# Altium PCB Light source driver circuit board.PcbDoc
Units mil, origin at the board's own origin, x right, y up, seen from the top; angles counter-clockwise.
Board outline 3775.03 x 1890.03 mil, 2 copper layers (Top Layer, Bottom Layer); 21 components, 13 nets, 57 pads, 5 vias.
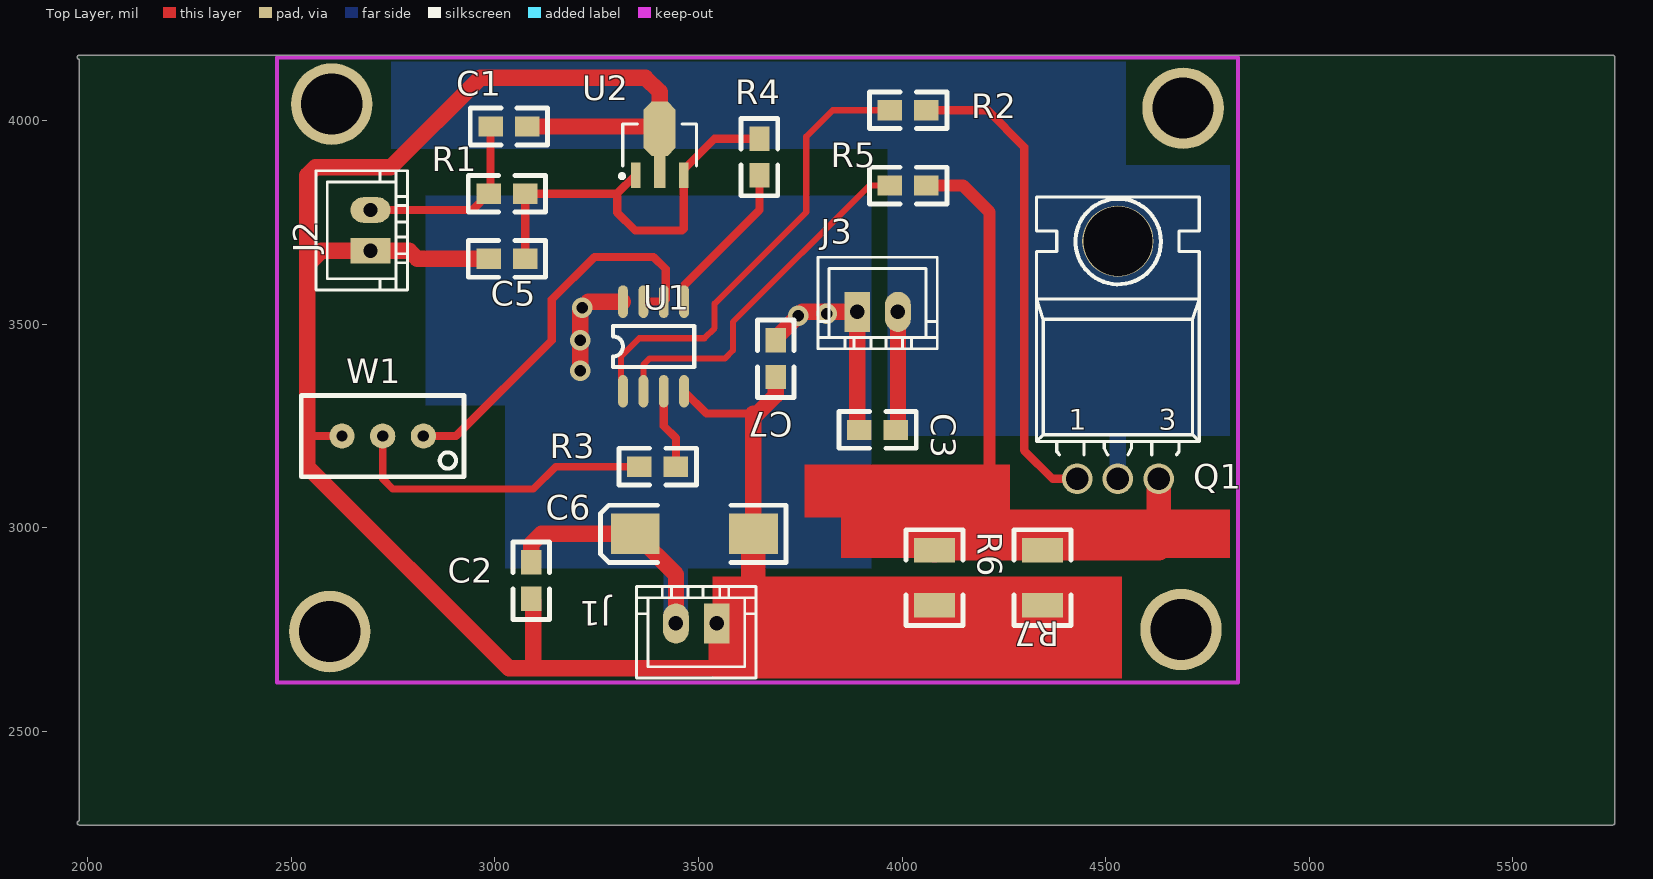
[diagram p0: Top Layer view]
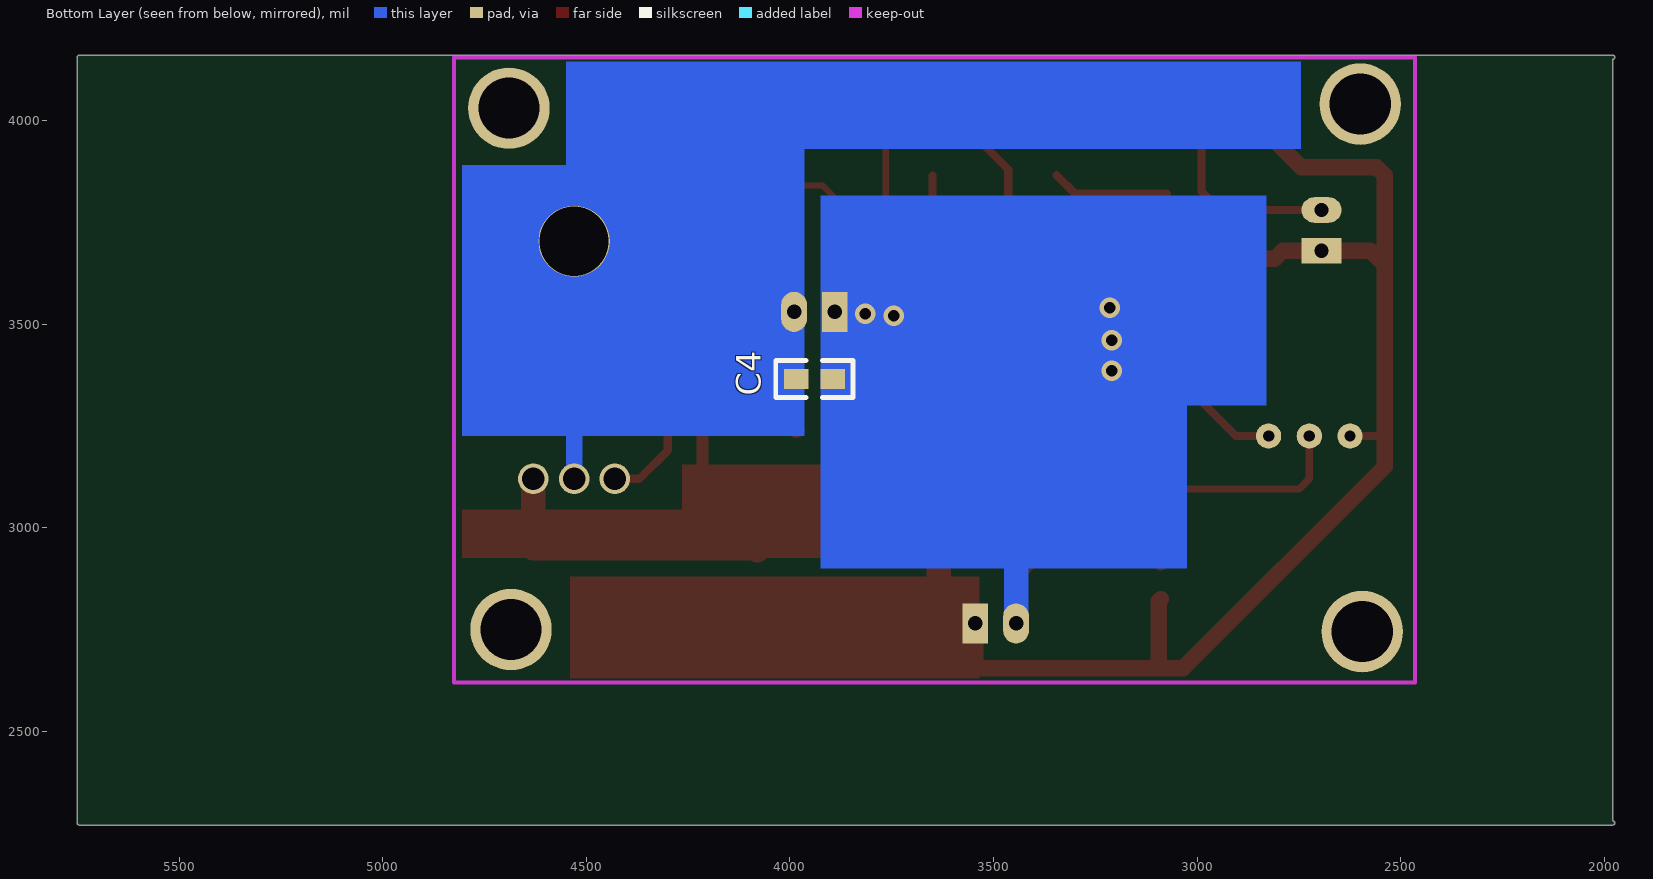
[diagram p1: Bottom Layer view, seen from below]

## Layer stack, top to bottom
Top Solder: solder mask 0.4, Solder Resist, Dk 3.5
Top Layer: signal copper 1.4
Dielectric 1: dielectric 12.6, FR-4, Dk 4.8
Bottom Layer: signal copper 1.4
Bottom Solder: solder mask 0.4, Solder Resist, Dk 3.5

## Board outline
1980,2269.99 cw(c1980,2275) 1979.98,2280.01 1979.98,4149.98 cw(c1980,4155) 1980,4160.02 5745,4160.02 cw(c5745,4155) 5750.02,4155 5750.02,2275 cw(c5745,2275) 5745,2269.99

## Design rules (kind name [scope] priority, off if disabled: settings)
Clearance [All] p1: gap=10
PolygonConnect [All] p1: connectstyle=Relief reliefconductorwidth=10 reliefentries=4 polygonreliefangle="90 Angle" airgapwidth=10
RoutingVias [All] p1: holewidth=28 width=50 viastyle="Through Hole" minholewidth=28 minwidth=50 maxholewidth=28 maxwidth=50
SolderMaskExpansion [All] p1: expansion=4
Width [All] p1: maxlimit=60 minlimit=10 preferedwidth=40 bottomlayer_minwidth=20 minimp=50.000000 maximp=50.000000 favimp=50.000000
29 further rules are at their usual default settings.

## Components (designator, comment, footprint, x,y, rotation, side; value= is the part's Value field where it differs from the comment)
C1 "0.1uF" 0805 3080,3985 r180 top
C2 "0.1uF" 0805 3090,2915 r270 top
C3 "0.1uF" 0805 3895,3240 r0 top
C4 "0.1uF" 0805 3895,3365 r0 bottom
C5 "0.1uF" 0805 2985,3660 r0 top
C6 "100uF" 7243 3345,2985 r180 top
C7 "0.1uF" 0805 3690,3460 r270 top
J1 "Power" XH2.54-2P_ֱ 3545,2765 r180 top
J2 "INPUT" XH2.54-2P_ֱ 2695,3680 r90 top
J3 "BEIGUANG" XH2.54-2P_ֱ 3890,3530 r0 top
Q1 "8050" TO220H 4430,3120 r0 top
R1 "510" 0805 2985,3820 r0 top
R2 "1K" 0805 3970,4025 r0 top
R3 "10K" 0805 3355,3150 r0 top
R4 "10K" 0805 3650,3955 r270 top
R5 "10K" 0805 4060,3840 r180 top
R6 "10" 1210 4080,2945 r270 top
R7 "10" 1210 4345,2945 r270 top
U1 "LM358D" SO-8 3315,3335 r90 top
U2 "TL431" SOT-89_M 3405,3940 r90 top
W1 "10K" VR 2825,3225 r180 top

## Footprints (in the part's own frame and the unit in brackets; to place one, negate y for a bottom-side part, rotate by r counter-clockwise, add the part's x,y. Pads: shape width x height; smd on the part's side, far side on the other; paste and mask are expansions set on the pad)
0805 [mil]
  rect 60x50 smd: 1(0,0) 2(90,0)
  silkscreen extent -50,-45 140,45
1210 [mil]
  rect 60x100 smd: 1(0,0) 2(135,0)
  silkscreen extent -50,-70 185,70
7243 [mil]
  rect 120x100 smd: 1(0,0) 2(-290,0)
  silkscreen extent -370,-70 85,70
SO-8 [mil]
  oval 80x24 smd: 1(0,0) 2(0,-50) 3(0,-100) 4(0,-150) 5(220,-150) 6(220,-100) 7(220,-50) 8(220,0)
  silkscreen extent 60,-175 160,25
SOT-89_M [mm] "SOT89, 3-Leads, Body 4.6x2.6 mm, Pitch 1.5mm, Lead Span 4.1mm, IPC Low Density"
  rect 1.6x0.6 smd: 1(-1.9,1.5) 3(-1.9,-1.5)
  rect 2x0.7 smd: 2(-1.7,0)
  oct 3.4x2 smd: 2(1,0)
  silkscreen extent -2.07,-2.3 1.3,2.47, body extent -1.3,-2.3 1.3,2.3, height 1.7
TO220H [mil]
  round 175 hole 170: 0(100,583.33)
  round 75 hole 55: 1(0,0) 2(100,0) 3(200,0)
  silkscreen extent -100,59 300,692
VR [mil]
  round 62 hole 28: 1(0,0) 2(200,0) 3(100,0)
  silkscreen extent -100,-100 300,100
XH2.54-2P_ֱ [mm]
  rect 1.6x2.5 hole 0.9: 1(0,0)
  oval 1.6x2.5 hole 0.9: 2(2.54,0)
  silkscreen extent -2.45,-2.3 4.99,3.4

## Part data
C1 C2 C3 C4 C5 C7: library part CAP, "Capacitor"
C6: library part ELECTRO1, "Electrolytic Capacitor"
J1 J2 J3: library part CON2, "Connector"
Q1: library part NPN, "NPN Transistor"
R1 R2 R3 R4 R5 R6 R7: library part RES2
U1: "Dual Low-Power Operational Amplifier"
U2: "Adjustable Precision Shunt Regulator"
W1: library part POT2, "Potentiometer"

## Free pads (board coordinates)
  round 200 hole 150: 1(2595,2745) 1(2600,4040) 1(4685,2750) 1(4690,4030)

## Via types
v1: diameter 50, hole 28, Top Layer to Bottom Layer, 5 vias

## Nets (pads, with @x,y where several pads share a name; then routed paths per layer and width w, separated by ;. In a path a pad name is that pad's centre, name@x,y a point inside that pad or via, vN(x,y) a via of type N, cw(c..) or ccw(c..) an arc to the next point about the centre after c; other vN are vias at no path point)
GND: C1.1 C2.2 C5.1 C6.2 C7.2 J1.1 J2.1 R6.2 R7.2 U1.4 U2.2 W1.2 | length 6231.9
  Top Layer w20: 2540,3240 2555,3225 W1.2 ; U1.4 3520,3280 3635,3280
  Top Layer w40: C5.1 2810,3660 2790,3680 J2.1 2575,3680 2540,3645 ; C1.1 3399.37,3985 3405,3979.37 3405,4070 3370,4105 2965,4105 2745,3885 2560,3885 2540,3865 2540,3645 ; C2.2 3095,2820 3095,2655 ; J1.1 3545,2680 3570,2655 3095,2655 ; C6.2 3635,3270 ; 3635,3280 3635,3270 ; C7.2 3690,3325 3635,3270 ; 2540,3645 2540,3240 2540,3150 3035,2655 3095,2655
  Top Layer w60: C6.2 3635,2800 3600,2765 J1.1 3645,2665 4085,2665 ; R6.2 4085,2805 4085,2665 ; R7.2 4345,2665 4085,2665
NetC1_2: C1.2 J2.2 R1.1 | length 473.6
  Top Layer w20: J2.2 2945,3780 R1.1 2990,3825 C1.2
NetC2_1: C2.1 C3.1 C4.1 C6.1 C7.1 J1.2 J3.1 U1.8 | length 1812.3
  Top Layer w40: C2.1 3090,2960 3115,2985 C6.1 3445,2885 J1.2 ; v1(3210,3385) 3210,3535 3230,3555 U1.8 ; C7.1 3690,3465 3755,3530 J3.1 3890,3245 C3.1
  Bottom Layer w40: 3445,3030 3460,3045 ; J3.1 3890,3370 C4.1
  Bottom Layer w60: J1.2 3445,3030
  other v1: 3210,3460 3745,3520 3815,3525 3215,3540
NetC3_2: C3.2 C4.2 J3.2 Q1.0 Q1.2 | length 630.4
  Top Layer w40: C3.2 3990,3245 J3.2
  Bottom Layer w40: C4.2 3990,3370 J3.2 ; Q1.2 4530,3270 4545,3285
NetC5_2: C5.2 R1.2 R4.1 U2.1 U2.3 | length 1041.1
  Top Layer w20: C5.2 R1.2 3300.75,3820 ; U2.1 3300.75,3820 ; R4.1 3540,3955 3464.06,3879.06 U2.3 3464.06,3734.06 3460,3730 3345,3730 3300.75,3774.25 3300.75,3820
NetQ1_1: Q1.1 R2.2 | length 1181.3
  Top Layer w20: R2.2 4210,4025 4300,3935 4300,3190 4370,3120 Q1.1
NetQ1_3: Q1.3 R5.1 R6.1 R7.1 | length 1739
  Top Layer w30: R5.1 4150,3840 4215,3775 4215,2940
  Top Layer w60: R6.1 4085,2950 4630,2950 Q1.3
NetR2_1: R2.1 U1.1 | length 1141.2
  Top Layer w15: U1.1 3310,3340 3310,3420 3355,3465 3515,3465 3540,3490 3540,3550 3765,3775 3765,3960 3830,4025 R2.1
NetR3_1: R3.1 W1.3 | length 768.1
  Top Layer w18: W1.3 2725,3120 2750,3095 3095,3095 3150,3150 R3.1
NetR3_2: R3.2 U1.3 | length 197.4
  Top Layer w20: U1.3 3415,3250 3445,3220 R3.2
NetR4_2: R4.2 U1.5 | length 386.6
  Top Layer w20: U1.5 3465,3595 3650,3780 R4.2
NetR5_2: R5.2 U1.2 | length 893.3
  Top Layer w15: U1.2 3365,3400 3380,3415 3565,3415 3585,3435 3585,3505 3920,3840 R5.2
NetU1_6: U1.6 U1.7 W1.1 | length 980.3
  Top Layer w20: W1.1 2905,3225 3140,3460 3140,3560 3245,3665 3390,3665 3420,3635 3420,3560 U1.6 U1.7

## Keep-outs
Keep-Out Layer:
  lines w10: 2465,2620 4825,2620 4825,4155 2465,4155 2465,2620

## Other copper
Top Layer:
  rectangle net NetQ1_3: 3760,3025 4265,3155
  rectangle net NetQ1_3: 3850,2925 4805,3045
  rectangle net GND: 3535,2630 4540,2880
Bottom Layer:
  rectangle net NetC2_1: 3025,2900 3925,3300
  rectangle net NetC3_2: 2745,3930 4045,4145
  rectangle net NetC2_1: 2830,3300 3925,3815
  rectangle net NetC3_2: 4550,3225 4805,3890
  rectangle net NetC3_2: 3965,3225 4550,4145

## Text inside footprints (layer, text, board x,y; h text height)
Q1: Top Overlay "1" at 4410,3240 h50; Top Overlay "3" at 4630,3240 h50